# Altium PCB Board.PcbDoc
Units mm, origin at the board's own origin, x right, y up, seen from the top; angles counter-clockwise.
Board outline 73.91 x 57.78 mm, 2 copper layers (Top Layer, Bottom Layer); 84 components, 50 nets, 276 pads, 18 vias.
Unrouted connection lines stored in the file: 81.
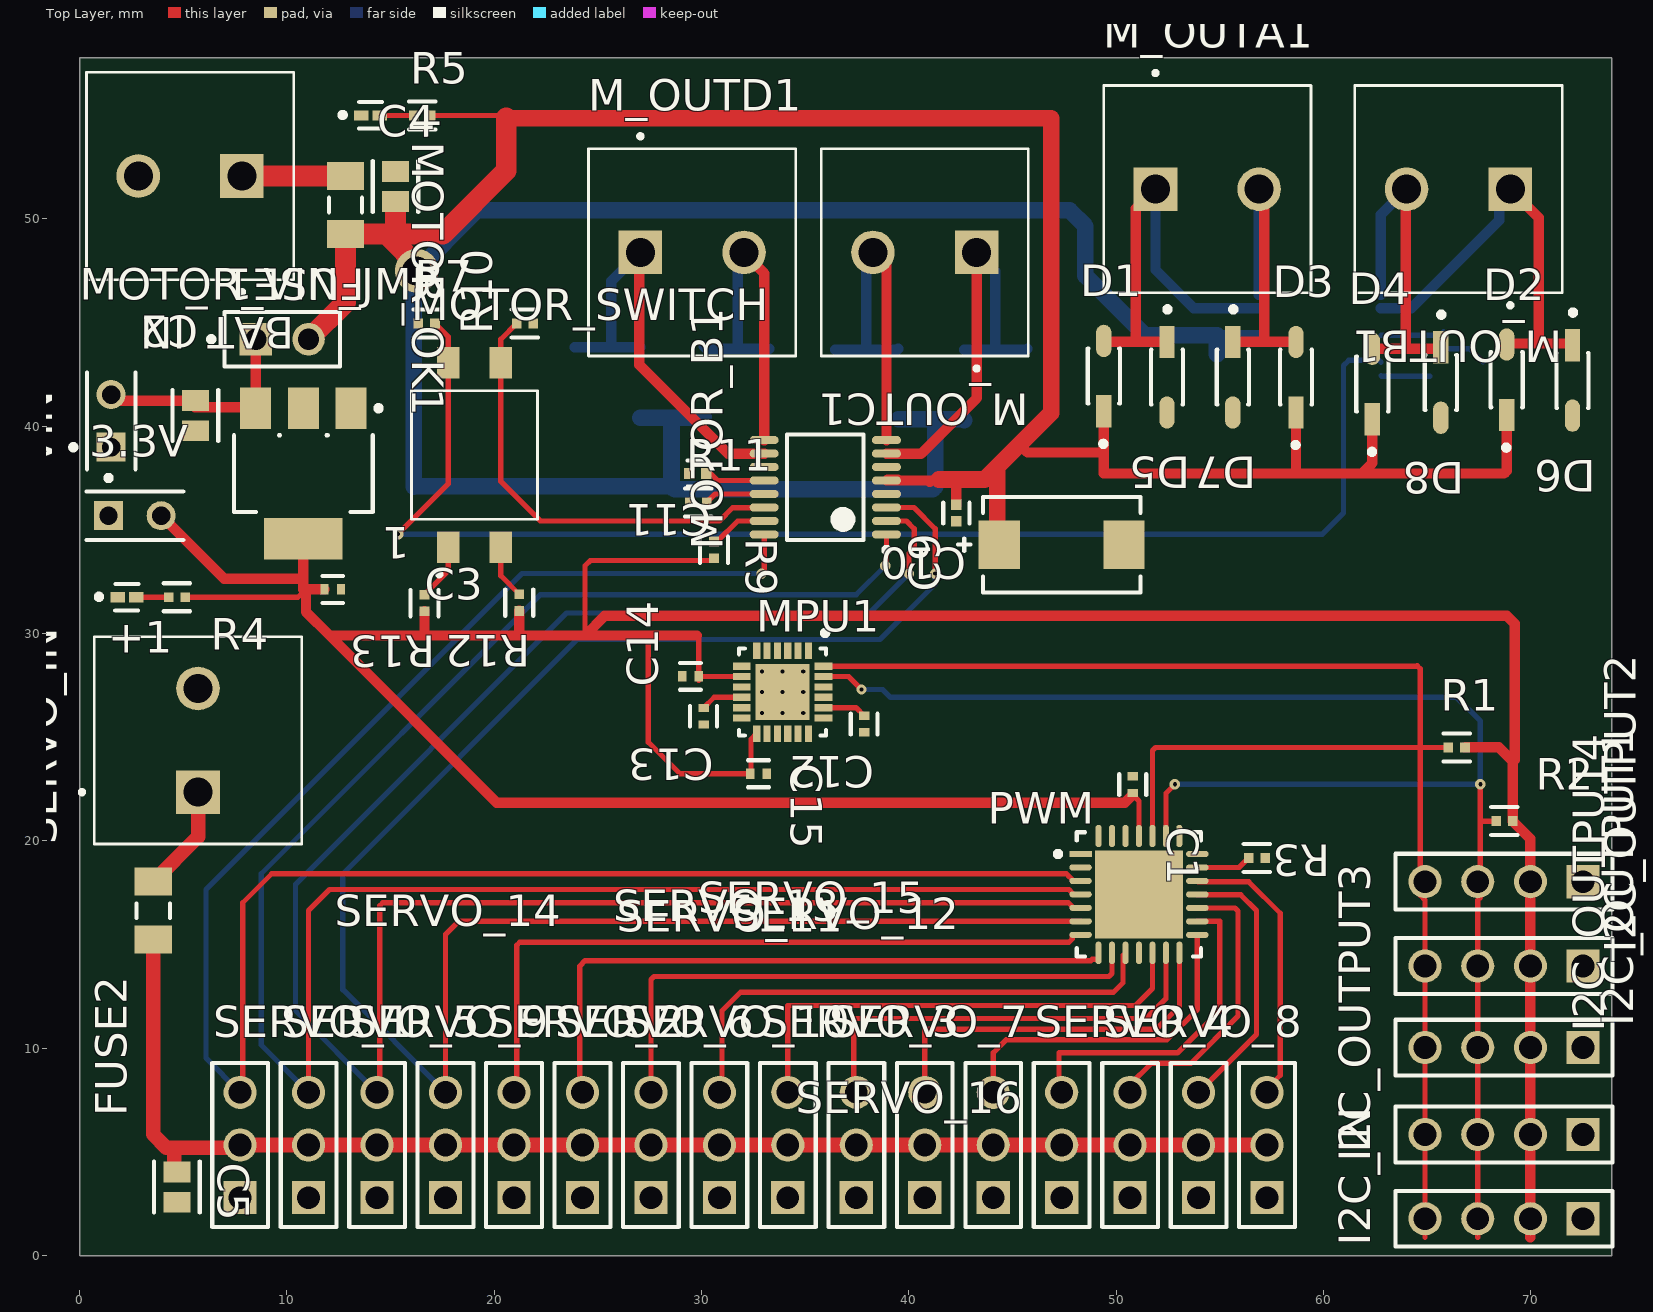
[diagram p0: Top Layer view]
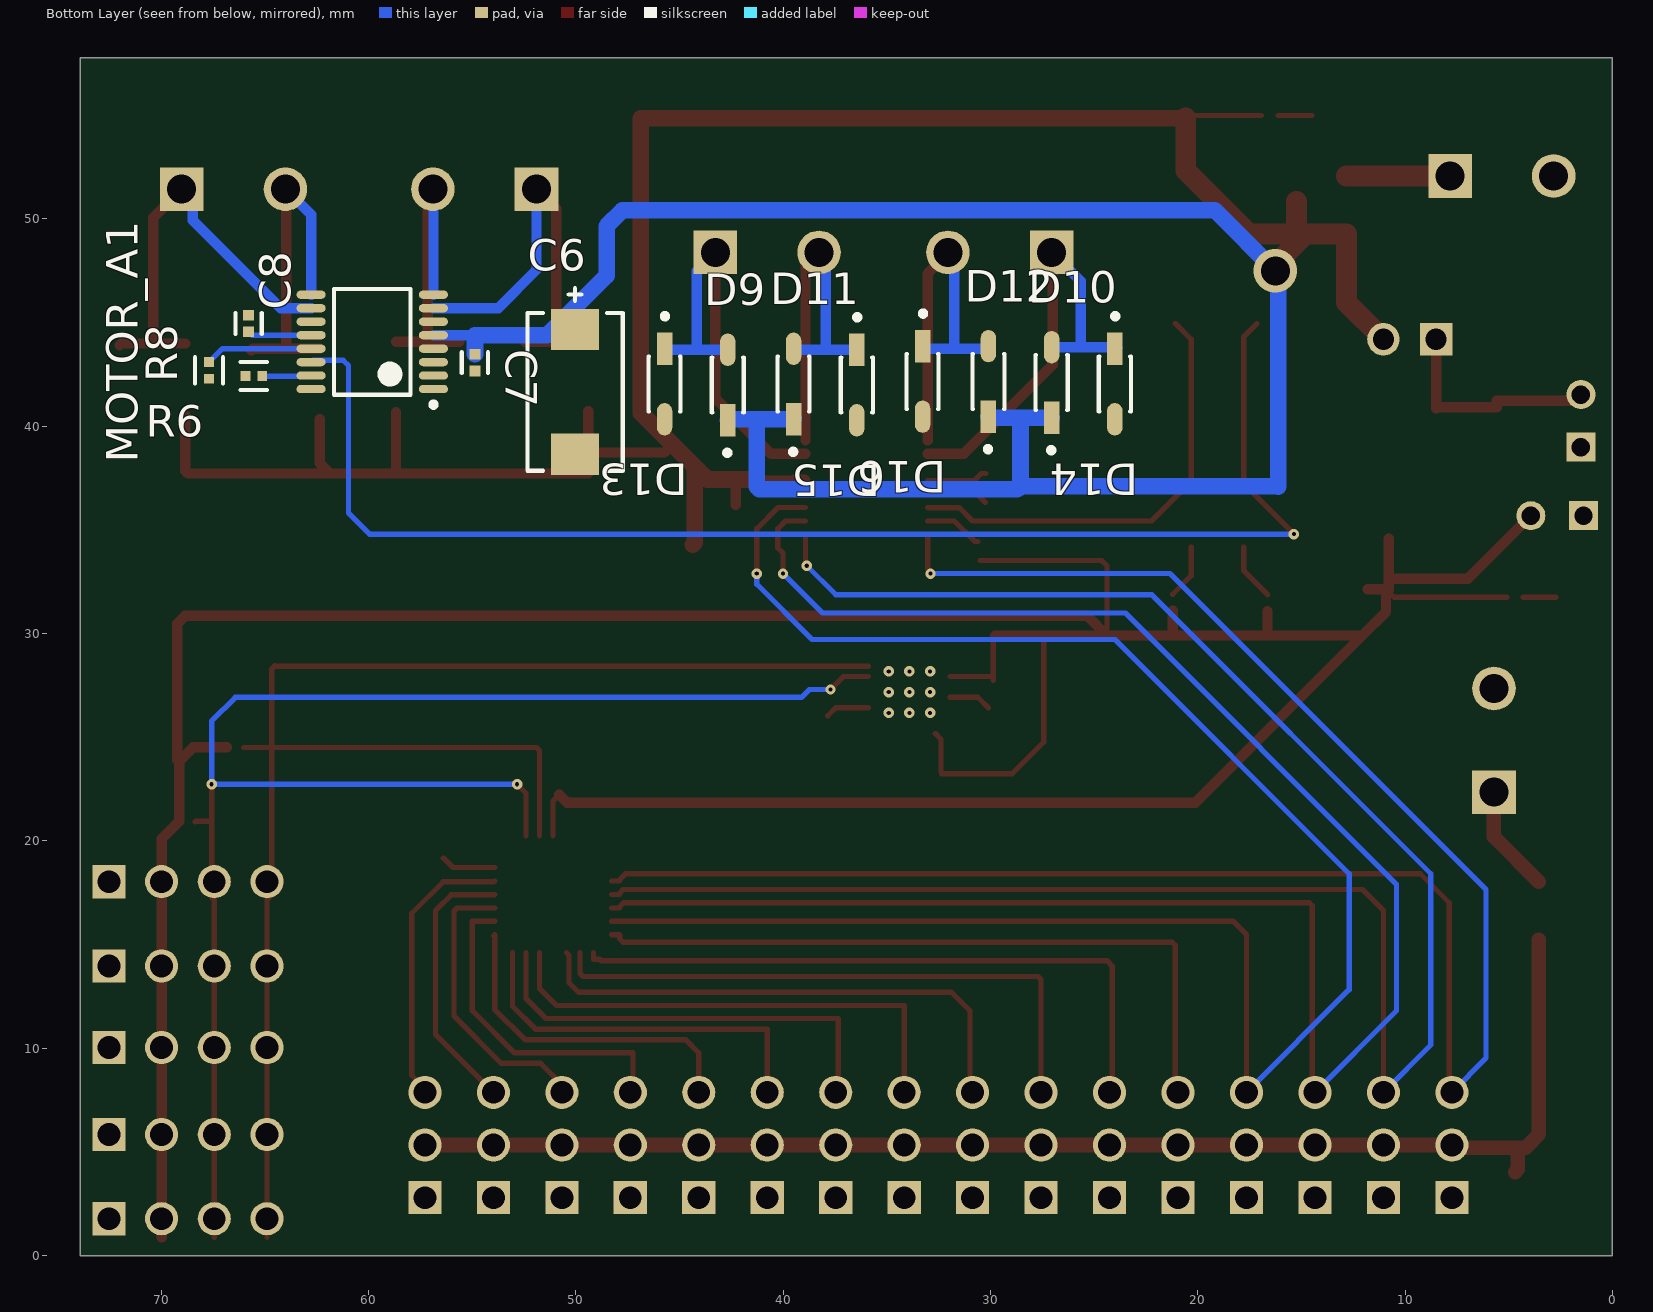
[diagram p1: Bottom Layer view, seen from below]
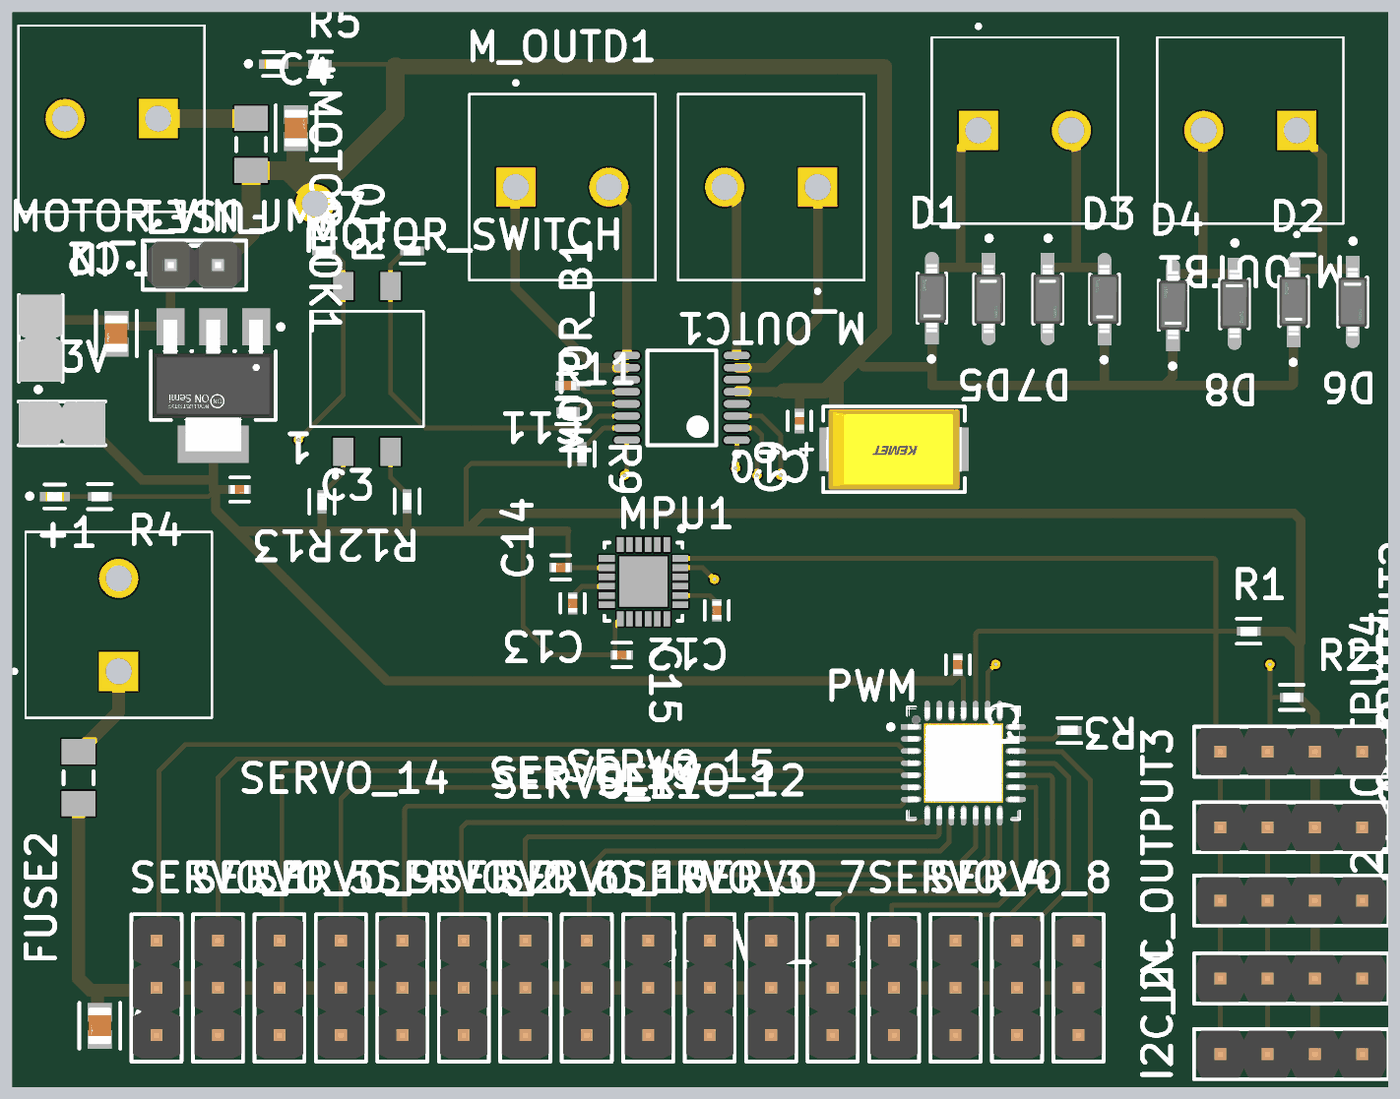
[diagram p2: 3D render of the assembled board from above, using the file's embedded part models]
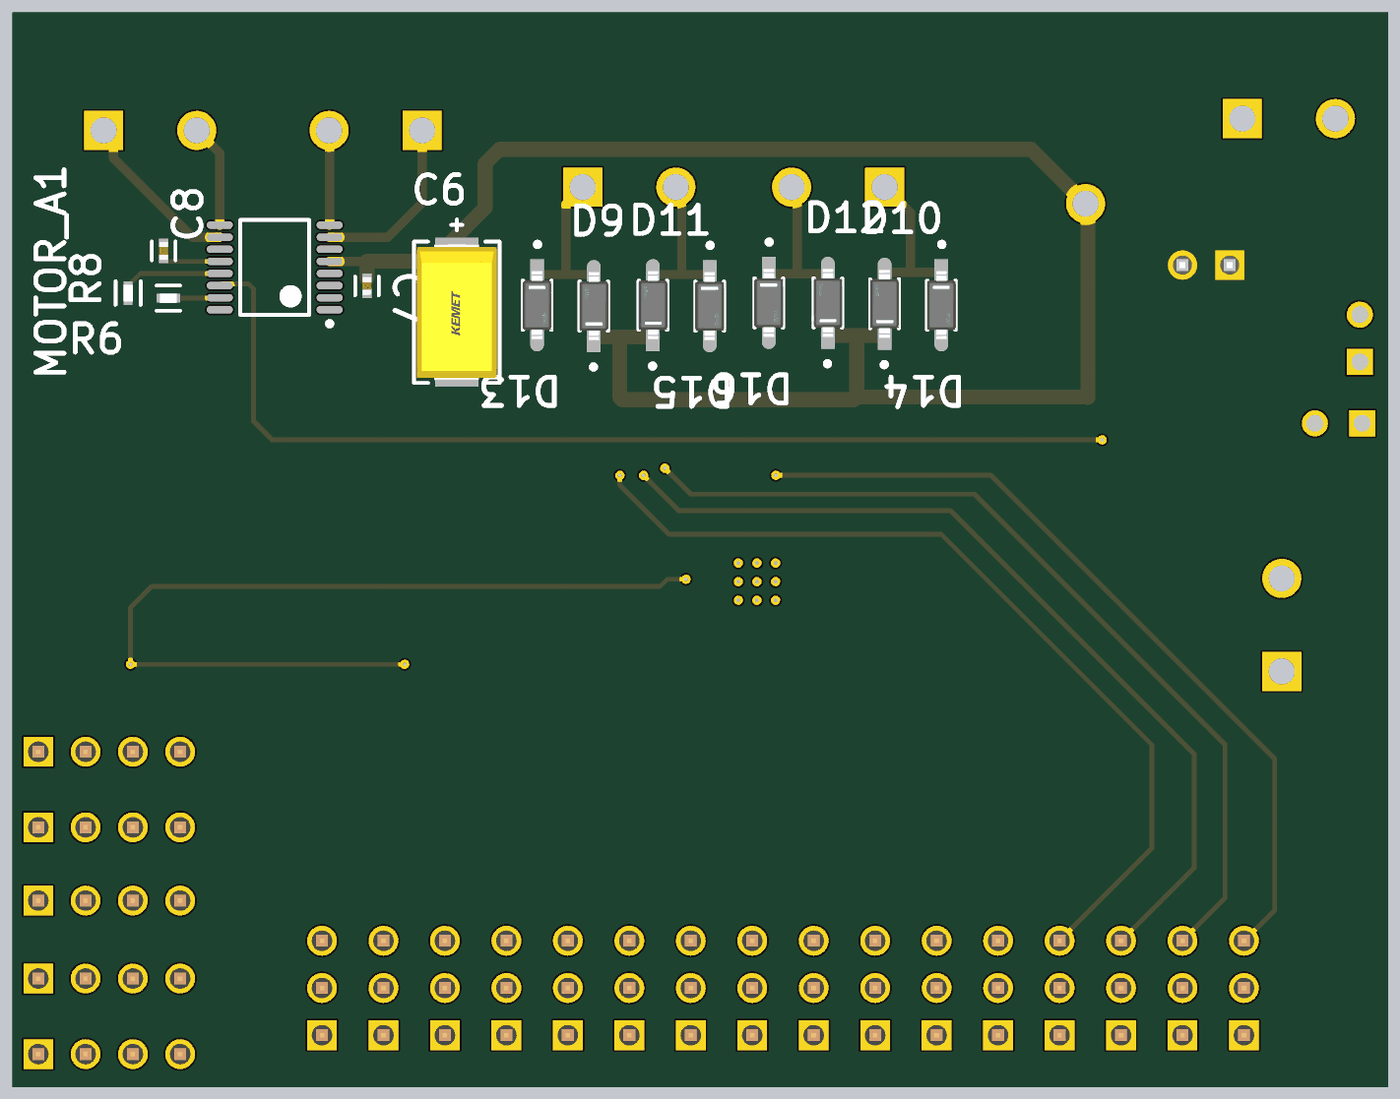
[diagram p3: 3D render of the assembled board from below, using the file's embedded part models]

## Layer stack, top to bottom
Top Solder: solder mask 0.0102, Solder Resist, Dk 3.5
Top Layer: signal copper 0.0356
Dielectric 1: dielectric 0.32, FR-4, Dk 4.8
Bottom Layer: signal copper 0.0356
Bottom Solder: solder mask 0.0102, Solder Resist, Dk 3.5

## Board outline
0,0 0,57.785 73.914,57.785 73.914,0

## Design rules (kind name [scope] priority, off if disabled: settings)
Clearance [All] p1: gap=0.15 ignorepadtopadclearanceinfootprint=TRUE
PolygonConnect [All] p1: connectstyle=Relief reliefconductorwidth=0.254 reliefentries=4 polygonreliefangle="90 Angle" airgapwidth=0.254
RoutingVias [All] p1: holewidth=0.711 width=1.27 viastyle="Through Hole" minholewidth=0.711 minwidth=1.27 maxholewidth=0.711 maxwidth=1.27
SolderMaskExpansion [All] p1: expansion=0.102 istentingtop=FALSE
UnRoutedNet [All] p1: checkbadconnections=TRUE
Width [All] p1: maxlimit=1 minlimit=0.254 preferedwidth=0.254
29 further rules are at their usual default settings.

## Classes and differential pairs
component class Sensors: C12 C13 C14 C15 MPU1
component class Power: 1 3.3V +1 +MOTOR_OK1 BAT_IN C2 C3 C4 C5 FUSE1 FUSE2 MOTOR_VIN_JMP R4 R5 SERVO_IN VIN
component class Motors: C6 C7 C8 C9 C10 C11 D1 D2 D3 D4 D5 D6 D7 D8 D9 D10 D11 D12 D13 D14 D15 D16 M_OUTA1 M_OUTB1 M_OUTC1 M_OUTD1 MOTOR_A1 MOTOR_B1 MOTOR_SWITCH R6 R7 R8 R9 R10 R11 R12 R13
component class Board: C1 I2C_IN I2C_OUTPUT1 I2C_OUTPUT2 I2C_OUTPUT3 I2C_OUTPUT4 PWM R1 R2 R3 SERVO_1 SERVO_2 SERVO_3 SERVO_4 SERVO_5 SERVO_6 SERVO_7 SERVO_8 SERVO_9 SERVO_10 SERVO_11 SERVO_12 SERVO_13 SERVO_14 SERVO_15 SERVO_16

## Components (designator, comment, footprint, x,y, rotation, side; value= is the part's Value field where it differs from the comment)
1 "NCV1117ST33T3G" FP-318H-MFG 10.795,37.719 r270 top
3.3V "5-146280-2" TECO-5-146280-2_V 2.667,35.687 r0 top
+1 "APHHS1005CGCK" FP-APHHS1005CGCK-MFG 2.286,31.75 r0 top
+MOTOR_OK1 "APHHS1005CGCK" FP-APHHS1005CGCK-MFG 14.039,54.991 r0 top
BAT_IN "282856-2" TE_282856-2 5.334,52.07 r180 top
C1 "100n 10V" FP-GRM155-0_05-MFG 50.8,22.714 r90 top
C2 "10u 25V" FP-GRM21B-0_15-IPC_C 5.588,40.513 r270 top
C3 "10u 6.3V" FP-GRM155-0_05-MFG 12.211,32.131 r0 top
C4 "10u 25V" FP-GRM21B-0_15-IPC_C 15.24,51.562 r90 top
C5 "10u 25V" FP-GRM21B-0_15-IPC_C 4.699,3.302 r270 top
C6 "47u 25V" FP-T491D476K025AT-MFG 50.038,41.656 r90 bottom
C7 "100n 25V" FP-C0402-BB-MFG 54.864,43.072 r270 bottom value="0.10 μF"
C8 "100n 16V" FP-C0402-BB-MFG 65.786,44.958 r90 bottom value="0.10 μF"
C9 "47u 25V" FP-T491D476K025AT-MFG 47.371,34.29 r180 top
C10 "100n 25V" FP-C0402-BB-MFG 42.291,35.814 r270 top value="0.10 μF"
C11 "100n 16V" FP-C0402-BB-MFG 29.826,37.719 r180 top value="0.10 μF"
C12 "2.2n 50V" FP-GRM155-0_05-MFG 37.846,25.635 r270 top
C13 "100n 2V" FP-GRM155-0_05-MFG 30.099,26.016 r270 top
C14 "10n 10V" FP-GRM155-0_05-MFG 29.464,27.94 r180 top
C15 "100n 10V" FP-GRM155-0_05-MFG 32.747,23.241 r0 top
D1 "PMEG40T30ERX" FP-SOD123-IPC_A 49.403,42.418 r90 top
D2 "PMEG40T30ERX" FP-SOD123-IPC_A 68.834,42.242 r90 top
D3 "PMEG40T30ERX" FP-SOD123-IPC_A 58.674,42.369 r90 top
D4 "PMEG40T30ERX" FP-SOD123-IPC_A 62.357,42.037 r90 top
D5 "PMEG40T30ERX" FP-SOD123-IPC_A 52.451,42.369 r270 top
D6 "PMEG40T30ERX" FP-SOD123-IPC_A 72.009,42.213 r270 top
D7 "PMEG40T30ERX" FP-SOD123-IPC_A 55.626,42.369 r270 top
D8 "PMEG40T30ERX" FP-SOD123-IPC_A 65.659,42.115 r270 top
D9 "PMEG40T30ERX" FP-SOD123-IPC_A 42.672,41.988 r90 bottom
D10 "PMEG40T30ERX" FP-SOD123-IPC_A 27.051,42.115 r90 bottom
D11 "PMEG40T30ERX" FP-SOD123-IPC_A 39.497,42.037 r90 bottom
D12 "PMEG40T30ERX" FP-SOD123-IPC_A 30.099,42.164 r90 bottom
D13 "PMEG40T30ERX" FP-SOD123-IPC_A 45.72,42.037 r270 bottom
D14 "PMEG40T30ERX" FP-SOD123-IPC_A 24.003,42.037 r270 bottom
D15 "PMEG40T30ERX" FP-SOD123-IPC_A 36.449,41.988 r270 bottom
D16 "PMEG40T30ERX" FP-SOD123-IPC_A 33.274,42.164 r270 bottom
FUSE1 "SF-1206HH15SF-1206HH10M-2M-2" RESC3216X12N 12.827,50.673 r270 top
FUSE2 "SF-1206HH15SF-1206HH10M-2M-2" RESC3216X12N 3.556,16.637 r270 top
I2C_IN "61300411121" 61300411121 68.707,1.778 r180 top
I2C_OUTPUT1 "61300411121" 61300411121 68.707,13.97 r180 top
I2C_OUTPUT2 "61300411121" 61300411121 68.707,18.034 r180 top
I2C_OUTPUT3 "61300411121" 61300411121 68.707,5.842 r180 top
I2C_OUTPUT4 "61300411121" 61300411121 68.707,10.033 r180 top
M_OUTA1 "282856-2" TE_282856-2 54.396,51.435 r0 top
M_OUTB1 "282856-2" TE_282856-2 66.508,51.435 r180 top
M_OUTC1 "282856-2" TE_282856-2 40.767,48.387 r180 top
M_OUTD1 "282856-2" TE_282856-2 29.551,48.387 r0 top
MOTOR_A1 "TC78H660FNG" TSOP65P640X120-16N 59.817,44.069 r0 bottom
MOTOR_B1 "TC78H660FNG" TSOP65P640X120-16N 35.97,37.058 r180 top
MOTOR_SWITCH "DS04-254-2-02BK-SMT" SW_DS04-254-2-02BK-SMT 19.05,38.613 r90 top
MOTOR_VIN_JMP "M20-9990246" FP-M20-9990246-MFG 9.779,44.196 r0 top
MPU1 "MPU6050" INSE-QFN-24_V 33.909,27.178 r270 top
PWM "PCA9685BS,118" FP-SOT788-1-IPC_B 51.099,17.421 r0 top
R1 "1k" FP-CRCW0402-e3-IPC_C 66.421,24.511 r0 top
R2 "1k" FP-CRCW0402-e3-IPC_C 68.728,20.955 r0 top
R3 "10k" FP-CRCW0402-e3-IPC_C 56.79,19.177 r180 top
R4 "470" FP-CRCW0402-e3-IPC_C 4.699,31.75 r0 top
R5 "470" FP-CRCW0402-e3-IPC_C 16.531,54.991 r0 top
R6 "10k" FP-CRCW0402-e3-IPC_C 65.532,42.418 r0 bottom
R7 "1Meg" FP-CRCW0402-e3-IPC_C 16.743,44.958 r0 top
R8 "47k" FP-CRCW0402-e3-IPC_C 67.691,42.693 r90 bottom
R9 "10k" FP-CRCW0402-e3-IPC_C 30.607,34.036 r270 top
R10 "1Meg" FP-CRCW0402-e3-IPC_C 21.484,44.958 r180 top
R11 "47k" FP-CRCW0402-e3-IPC_C 29.845,36.322 r0 top
R12 "10k" FP-CRCW0402-e3-IPC_C 21.209,31.496 r270 top
R13 "10k" FP-CRCW0402-e3-IPC_C 16.637,31.475 r270 top
SERVO_1 "61300311121" 61300311121 7.747,5.334 r90 top
SERVO_2 "61300311121" 61300311121 20.955,5.334 r90 top
SERVO_3 "61300311121" 61300311121 34.163,5.334 r90 top
SERVO_4 "61300311121" 61300311121 47.371,5.334 r90 top
SERVO_5 "61300311121" 61300311121 11.049,5.334 r90 top
SERVO_6 "61300311121" 61300311121 24.257,5.334 r90 top
SERVO_7 "61300311121" 61300311121 37.465,5.334 r90 top
SERVO_8 "61300311121" 61300311121 50.673,5.334 r90 top
SERVO_9 "61300311121" 61300311121 14.351,5.334 r90 top
SERVO_10 "61300311121" 61300311121 27.559,5.334 r90 top
SERVO_11 "61300311121" 61300311121 40.767,5.334 r90 top
SERVO_12 "61300311121" 61300311121 53.975,5.334 r90 top
SERVO_13 "61300311121" 61300311121 17.653,5.334 r90 top
SERVO_14 "61300311121" 61300311121 30.861,5.334 r90 top
SERVO_15 "61300311121" 61300311121 44.069,5.334 r90 top
SERVO_16 "61300311121" 61300311121 57.277,5.334 r90 top
SERVO_IN "282856-2" TE_282856-2 5.715,24.852 r90 top
VIN "5-146280-2" TECO-5-146280-2_V 1.524,40.259 r90 top

## Footprints (in the part's own frame and the unit in brackets; to place one, negate y for a bottom-side part, rotate by r counter-clockwise, add the part's x,y. Pads: shape width x height; smd on the part's side, far side on the other; paste and mask are expansions set on the pad)
61300311121 [mm] "Pin Header, pitch 2.54 mm, THT, Vertical, single row, 3p"
  rect 1.6x1.6 hole 1.1: 1(-2.54,0)
  round 1.6 hole 1.1: 2(0,0) 3(2.54,0)
  silkscreen extent -3.96,-1.35 3.96,1.35, body extent -3.81,-1.27 3.81,1.27, height 8.57
61300411121 [mm] "Pin Header, pitch 2.54 mm, THT, Vertical, single row, 4p"
  rect 1.6x1.6 hole 1.1: 1(-3.81,0)
  round 1.6 hole 1.1: 2(-1.27,0) 3(1.27,0) 4(3.81,0)
  silkscreen extent -5.23,-1.35 5.23,1.35, body extent -5.08,-1.27 5.08,1.27, height 8.57
FP-318H-MFG [mm]
  rect 2x1.5 smd paste+0 mask+0: 1(-3.15,2.3) 2(-3.15,0) 3(-3.15,-2.3)
  rect 2x3.8 smd paste+0 mask+0: 4(3.15,0)
  silkscreen extent -3.27,-3.35 1.85,3.75, body extent -4.25,-3.45 4.25,3.45, height 0.25
FP-APHHS1005CGCK-MFG [mm]
  rect 0.7x0.5 smd paste+0 mask+0: 1(-0.45,0) 2(0.45,0)
  silkscreen extent -1.47,-0.63 0.55,0.65, body extent -0.9,-0.4 0.9,0.4, height 0.25
FP-C0402-BB-MFG [mm]
  rect 0.52x0.52 smd paste+0 mask+0: 1(-0.4,0) 2(0.4,0)
  silkscreen extent -0.5,-0.64 0.5,0.64, body extent -0.5,-0.25 0.5,0.25, height 0.55
FP-CRCW0402-e3-IPC_C [mm]
  rect 0.468x0.472 smd paste+0 mask+0: 1(-0.402,0) 2(0.402,0)
  silkscreen extent -0.64,-0.67 0.64,0.67, body extent -0.74,-0.38 0.74,0.38, height 0.25
FP-GRM21B-0_15-IPC_C [mm]
  rect 1.006x1.308 smd paste+0 mask+0: 1(-0.726,0) 2(0.726,0)
  silkscreen extent -1.23,-1.1 1.23,1.1, body extent -1.33,-0.8 1.33,0.8, height 0.25
FP-GRM155-0_05-MFG [mm]
  rect 0.4x0.5 smd paste+0 mask+0: 1(-0.4,0) 2(0.4,0)
  silkscreen extent -0.5,-0.65 0.5,0.65, body extent -0.7,-0.38 0.7,0.38, height 0.25
FP-M20-9990246-MFG [mm]
  rect 1.57x1.57 hole 1.02 paste-1000 mask+0: 1(-1.27,0)
  round 1.57 hole 1.02 paste-1000 mask+0: 2(1.27,0)
  silkscreen extent -3.55,-1.32 2.79,1.32, body extent -2.89,-1.42 2.89,1.42, height 0.25
FP-SOD123-IPC_A [mm]
  rect 1.557x0.742 smd paste+0 mask+0: 1(-1.7,0)
  rrect100% 1.557x0.742 smd paste+0 mask+0: 2(1.7,0)
  silkscreen extent -3.39,-0.77 1.33,0.77, body extent -2.98,-1.28 2.98,1.28, height 0.25
FP-SOT788-1-IPC_B [mm]
  rect 1.081x0.292 smd paste+0 mask+0: 1(-2.816,1.95)
  rrect100% 1.081x0.292 smd paste+0 mask+0: 2(-2.816,1.3) 3(-2.816,0.65) 4(-2.816,0) 5(-2.816,-0.65) 6(-2.816,-1.3) 7(-2.816,-1.95) 15(2.816,-1.95) 16(2.816,-1.3) 17(2.816,-0.65) 18(2.816,0) 19(2.816,0.65) 20(2.816,1.3) 21(2.816,1.95)
  rrect100% 0.292x1.081 smd paste+0 mask+0: 8(-1.95,-2.816) 9(-1.3,-2.816) 10(-0.65,-2.816) 11(0,-2.816) 12(0.65,-2.816) 13(1.3,-2.816) 14(1.95,-2.816) 22(1.95,2.816) 23(1.3,2.816) 24(0.65,2.816) 25(0,2.816) 26(-0.65,2.816) 27(-1.3,2.816) 28(-1.95,2.816)
  rect 4.25x4.25 smd paste-1000 mask+0: 29(0,0)
  silkscreen extent -4.03,-3 3,3, body extent -3.61,-3.61 3.61,3.61, height 0.25
FP-T491D476K025AT-MFG [mm]
  rect 1.99x2.33 smd paste+0 mask+0: 1(-3.01,0) 2(3.01,0)
  silkscreen extent -3.8,-2.3 5,2.3, body extent -3.65,-2.15 3.65,2.15, height 3.1
INSE-QFN-24_V [mm] "QFN, 24-Leads, Body 4.00x4.00mm, Pitch 0.50mm, Thermal Pad 2.7x2.6mm"
  rect 0.8x0.35 smd: 1(-2,1.25) 2(-2,0.75) 3(-2,0.25) 4(-2,-0.25) 5(-2,-0.75) 6(-2,-1.25) 13(2,-1.25) 14(2,-0.75) 15(2,-0.25) 16(2,0.25) 17(2,0.75) 18(2,1.25)
  rect 0.35x0.85 smd: 7(-1.25,-1.975) 8(-0.75,-1.975) 9(-0.25,-1.975) 10(0.25,-1.975) 11(0.75,-1.975) 12(1.25,-1.975) 19(1.25,1.975) 20(0.75,1.975) 21(0.25,1.975) 22(-0.25,1.975) 23(-0.75,1.975) 24(-1.25,1.975)
  rect 2.7x2.6 smd: 25(0,0)
  silkscreen extent -2.97,-2.1 2.1,2.18, body extent -2,-2 2,2, height 0.95
RESC3216X12N [mm] "Chip Resistor, 2-Leads, Body 3,20x1,60mm, IPC Medium Density"
  rect 1.35x1.8 smd: 1(-1.4,0) 2(1.4,0)
  silkscreen extent -0.35,-0.8 0.35,0.8, body extent -1.7,-0.9 1.7,0.9, height 1.2
SW_DS04-254-2-02BK-SMT [mm]
  rect 1.5x1.1 smd: 1A(-4.45,1.27) 1B(4.45,1.27) 2A(-4.45,-1.27) 2B(4.45,-1.27)
  silkscreen extent -5.85,-3.04 3.1,3.04
TE_282856-2 [mm]
  rect 2.1x2.1 hole 1.4: 1(-2.5,0)
  round 2.1 hole 1.4: 2(2.5,0)
  silkscreen extent -5,-5 5,5.7
TECO-5-146280-2_V [mm] "Connector, 2-Leads, Body 4.67x2.34mm, Pitch 2.54mm"
  rect 1.4x1.4 hole 0.89: 1(-1.27,0)
  round 1.4 hole 0.89: 2(1.27,0)
  silkscreen extent -2.33,-1.17 2.33,1.94, body extent -2.34,-1.17 2.34,1.17, height 5.33
TSOP65P640X120-16N [mm] "TSOP, 16-Leads, Body 5,00x4,40mm, Pitch 0,65mm, IPC Medium Density"
  oval 1.4x0.4 smd: 1(-2.95,2.275) 2(-2.95,1.625) 3(-2.95,0.975) 4(-2.95,0.325) 5(-2.95,-0.325) 6(-2.95,-0.975) 7(-2.95,-1.625) 8(-2.95,-2.275) 9(2.95,-2.275) 10(2.95,-1.625) 11(2.95,-0.975) 12(2.95,-0.325) 13(2.95,0.325) 14(2.95,0.975) 15(2.95,1.625) 16(2.95,2.275)
  silkscreen extent -3.07,-2.55 1.85,3.15, body extent -1.91,-2.55 1.91,2.55, height 1.2

## Part data
1: library part CMP-07128-000021-1, "IC REG LINEAR 3.3V 1A SOT223", Ambient Temperature Range High=+125°C, Ambient Temperature Range Low=-40°C, Dropout Voltage=1.07V, Manufacturer="ON Semiconductor", Max Junction Temp=+150°C, Max Supply Voltage=20V, Min Supply Voltage=2.4V, Nominal Supply Current=6mA, Output Current=1A, Output Voltage=3.3V, Package=318H, Temperature="-55°C to +150°C", Temperature Range Low=-55°C, Accuracy Percentage=1%, Automotive=Yes, Automotive Grade="Grade 0", Category=IC, ComponentLink2Description=Datasheet, ComponentLink2URL=https://www.onsemi.com/pub/Collateral/NCP1117-D.PDF, Device Class L1="Integrated Circuits (ICs)", Device Class L2="Power Management ICs", Device Class L3="Voltage Regulators - Linear", Digikey Description="IC REG LINEAR 3.3V 1A SOT223", Height=1.8mm, Ipc Land Pattern Name=SOT230P700X180-4, Lead Free=Yes, Manufacturer Part Number=NCV1117ST33T3G, Mouser Description="LDO Voltage Regulators 3.3V 1.0A Automotive", Number Of Outputs=1, Octopart=https://octopart.com/ncv1117st33t3g-on+semiconductor-1215835, Output Type=Fixed, RoHS=TRUE, Standoff Height=0.02mm, Temperature Range High=+150°C
3.3V VIN: library part CMP-2000-07492-1, "Male Header, Pitch 2.54 mm, 1 x 2 Position, Height 8.21 mm, Tail Length 3.05 mm, -65 to 105 degC, RoHS, Bulk", Case\/Package=100, Colour=Black, Current Rating=3A, Flammability Rating=UL94V-0, High Temperature Housing=Yes, Manufacturer="TE Connectivity", Max Current Rating=5A, Max Operating Temperature=105degC, Min Operating Temperature=-65degC, Package Description="Male Header, Pitch 2.54 mm, 1 x 2 Position, Height 8.21 mm, Tail Length 3.05 mm", Package Quantity=500, Approvals=CSA, Board Standoff=No(Without), Connector Type=Header, Contact Gender=Male, Contact Material=CopperAlloy, Contact Mating Length=0.23inch, Contact Plating=Matte, Contact Protection=No(Without), Contact Shape=Square, Datasheet URL=http://www.te.com/commerce/DocumentDelivery/DDEController?Action=showdoc&DocId=Customer+Drawing%7F146280%7FH1%7Fpdf%7FEnglish%7FENG_CD_146280_H1.pdf%7F5-146280-2, Datasheet Version="Rev. H1, 08/2016", Depth=2.34mm, Gasket=No(Without), High Speed Serial Data Connector=No, Housing Colour=Black, Housing Material=Polymer, Keyed=No, Length=4.67mm, Manufacturer URL=http://www.te.com/, Mating Alignment=No(Without), Mating Connector Lock=No(Without), Mating Post Length=0.23inch, Mount=ThroughHole, Mounting Technology=ThroughHole, Number of Contacts=2, Number of Positions=2, Number of Rows=1, Orientation=Straight, Package Reference=5-146280-2, Packaging=Carton, Panel Mount Retention=No(Without), PCB Mount Retention=Without, PCB Mounting Orientation=Vertical, PCB Thickness=0.063inch, Pitch=2.54mm, Radiation Hardening=No, RoHSCompliant=true, Row Spacing=2.54mm, Selectively Loaded=No(Without), Stabilizers=No(Without), Termination=ThroughHole, Termination Post Length=0.12inch
+1 +MOTOR_OK1: library part CMP-44529-000044-1, "LED GREEN CLEAR CHIP SMD", Case Code (Imperial)=0402, Case Code (Metric)=1005, Color=Green, Forward Current=20mA, Forward Voltage=2.1V, Lens Color=Clear, Max Operating Temperature=85°C, Min Operating Temperature=-40°C, Package Quantity=2000, Case/Package=0402, Dominant Wavelength=570nm, Height=0.6mm, Illumination Color=Green, Lead Free="Lead Free", Length=1mm, Lens Style=Clear, Luminous Intensity=50mcd, Mount="Surface Mount", Number of LEDs=1, Number of Pins=2, Packaging="Tape and Reel", Test Current=20mA, Viewing Angle=120°, Wavelength=570nm, Width=0.5mm
BAT_IN M_OUTA1 M_OUTB1 M_OUTC1 M_OUTD1 SERVO_IN: library part CMP-036-000000-1, "TERMI-BLOK PCB MOUNT 2P", Package=None, Component Type=Standard, Design Item ID=282856-2, Digi-Key_Part_Number=A98108-ND, Digi-Key_Purchase_URL=https://www.digikey.com/product-detail/en/te-connectivity-amp-connectors/1-282856-2/A98108-ND/1826971?utm_source=snapeda&utm_medium=aggregator&utm_campaign=symbol, EU_RoHS_Compliance="Compliant with Exemptions", MF="TE Connectivity", MP=282856-2, Pin Count=2, SnapEDA_Link=https://www.snapeda.com/parts/282856-2/TE%20Connectivity%20AMP%20Connectors/view-part/1809079/?ref=snap, Source=SnapEDAsch.SchLib, TE_purchase_URL=https://www.te.com/usa-en/product-282856-2.html?te_bu=Cor&te_type=disp&te_campaign=seda_glo_cor-seda-global-disp-prtnr-fy19-seda-model-bom-cta_sma-317_1&elqCampaignId=32493
C1 C3 C12 C13 C14 C15: library part CMP-2008-04345-2, "Chip Multilayer Ceramic Capacitors for General Purpose, 0402, 390pF, C0G, 30ppm/°C, 5%, 50V", Capacitance=390pF, Case Code (Imperial)=0402, Case Code (Metric)=1005, Dielectric=C0G, Max Operating Temperature=125°C, Min Operating Temperature=-55°C, Package Quantity=1, Temperature Coefficient=30ppm/°C, Tolerance=5%, Voltage=50V, Case/Package=0402, Depth=0.5mm, Height=0.5mm, Lead Free="Lead Free", Length=1mm, Material=Ceramic, Mount="Surface Mount", Packaging="Tape and Reel", Radiation Hardening=No, REACH SVHC="No SVHC", Termination=SMD/SMT, Thickness=0.022inch, Voltage Rating=50V, Voltage Rating (DC)=50V, Width=0.02inch
C2 C4 C5: library part CMP-2007-03541-2, "Chip Multilayer Ceramic Capacitors for General Purpose, 0805, 10uF, X5R, 15%, 10%, 25V", Capacitance=10uF, Case Code (Imperial)=0805, Case Code (Metric)=2012, Dielectric=X5R, Max Operating Temperature=85°C, Min Operating Temperature=-55°C, Package Quantity=1, Tolerance=10%, Voltage=25V, Case/Package=0805, Depth=1.25mm, Height=1.25mm, Lead Free="Lead Free", Length=2mm, Material=Ceramic, Mount="Surface Mount", Packaging="Tape and Reel", Radiation Hardening=No, Termination=SMD/SMT, Thickness=0.053inch, Voltage Rating=25V, Voltage Rating (DC)=25V, Width=0.049inch
C6 C9: library part CMP-03017-000020-1, "CAP TANT 47UF 10% 25V 2917", Capacitance=47uF, Case Code (Imperial)=2917, Case Code (Metric)=7343, Dielectric Material=Tantalum, ESR (Equivalent Series Resistance)=700mR, Leakage Current=11.8uA, Max Operating Temperature=125°C, Min Operating Temperature=-55°C, Package Quantity=1, Ripple Current=463mA, Tolerance=10%, Voltage=25V, Case/Package=2917, Depth=4.3mm, Dissipation Factor=10%, Failure Rate=0.001%, Features="General Purpose", Height=2.8mm, Height - Seated (Max)=0.122inch, Lead Free="Lead Free", Length=7.3mm, Life (Hours)=2000Hour, Mount="Surface Mount", Number of Pins=2, Packaging="Tape and Reel", Polarity=Polar, Radiation Hardening=No, REACH SVHC="No SVHC", RoHS Compliant=Yes, Termination=SMD/SMT, Voltage Rating=25V, Voltage Rating (DC)=25V, Weight=0.023634oz, Width=4.3mm
C7 C8 C10 C11: library part CMP-2008-02108-2, "CAP CER 0.1UF 16V X7R 0402", Capacitance="0.10 μF", Manufacturer=Kemet, Manufacturer Part Number=C0402C104K4RACTU, Package=C0402-BB, Temperature="-55°C to +125°C", Temperature Characteristic=X7R, Temperature Coefficient=15%, Temperature Range High=+125°C, Temperature Range Low=-55°C, Tolerance=0.1, Voltage Rating="16 V", Automotive=No, Category=Cap, ComponentLink2Description=Datasheet, ComponentLink2URL=https://content.kemet.com/datasheets/KEM_C1002_X7R_SMD.pdf, Device Class L1="Passive Components", Device Class L2=Capacitors, Device Class L3="Ceramic Capacitors", Digikey Description="CAP CER 0.1UF 16V X7R 0402", Height=0.55mm, Ipc Land Pattern Name=CAPC10050X50, Lead Free=Yes, Material=Ceramic, Mouser Description="Cap Ceramic 0.1uF 16V X7R 10% SMD 0402 125?C Paper T/R - Tape and Reel (Alt: C0402C104K4RAC TU)", Octopart=https://octopart.com/c0402c104k4ractu-kemet-94158, RoHS=TRUE
D1 D2 D3 D4 D5 D6 D7 D8 D9 D10 D11 D12 D13 D14 D15 D16: library part CMP-0303-00003-3, "DIODE SCHOTTKY 40V 1A SOD123", Average Rectified Current=1A, Capacitance=110pF, Case/Package=SOD-123-2, Forward Voltage=450mV, Max Forward Surge Current (Ifsm)=25A, Max Operating Temperature=125°C, Max Power Dissipation=450mW, Max Repetitive Reverse Voltage (Vrrm)=40V, Min Operating Temperature=-65°C, Package Quantity=3000, Peak Reverse Current=50uA, Contact Plating=Tin, Current Rating=1A, Element Configuration=Single, Forward Current=1A, Height=1.25mm, Lead Free="Lead Free", Length=2.85mm, Max Reverse Voltage (DC)=40V, Number of Pins=2, Output Current=1A, Packaging="Tape and Reel", Peak Non-Repetitive Surge Current=25A, Polarity=Standard, Radiation Hardening=No, REACH SVHC="No SVHC", Termination=SMD/SMT, Voltage Rating (DC)=40V, Weight=0.000353oz, Width=1.7mm
FUSE1 FUSE2: library part CMP-005-00013-1, "Fuse Chip 10A 24VDC High Current and High Inrush Current Withstand 2-Pin SMD T/R"
I2C_IN I2C_OUTPUT1 I2C_OUTPUT2 I2C_OUTPUT3 I2C_OUTPUT4: library part CMP-1502-01064-1, "THT Vertical Pin Header WR-PHD, Pitch 2.54 mm, Single Row, 4 pins", Contact Resistance=20mOhm, Manufacturer="Wurth Elektronik", Operating Temperature=-40to105degC, Rated Current=3A, Withstanding Voltage=500VAC, Working Voltage=250VAC, Datasheet URL=https://katalog.we-online.de/em/datasheet/6130xx11121.pdf, Gender=Male, Manufacturer URL=http://www.we-online.de, Mounting Technology=THT, Orientation=Vertical, Package Reference=61300411121, Packaging=Bag, Part Number=61300411121, Pin Number=4, Pitch=2.54mm, Publisher=WurthElektronik, Row Number=Single
MOTOR_A1 MOTOR_B1: library part CMP-024-00000-1, "Toshiba two channel dc motor driver , 2A for each channel."
MOTOR_SWITCH: library part CMP-038-000000-1, "2 Position, Surface Mount, 2.54 mm Pitch, Flat Slide Actuator, Flat Bottom, SMT Pin, DIP Switch", Package=None, Check_prices=https://www.snapeda.com/parts/DS04-254-2-02BK-SMT/CUI+Devices/view-part/?ref=eda, Component Type=Standard, CUI_purchase_URL=https://www.cuidevices.com/product/switches/dip-switches/ds04-254-smt-series?utm_source=snapeda.com&utm_medium=referral&utm_campaign=snapedaBOM, Design Item ID=DS04-254-2-02BK-SMT, Digi-Key_Part_Number=2223-DS04-254-2-02BK-SMT-ND, MF="CUI Devices", MP=DS04-254-2-02BK-SMT, Pin Count=4, Purchase-URL=https://pricing.snapeda.com/search/part/DS04-254-2-02BK-SMT/?ref=eda, SnapEDA_Link=https://www.snapeda.com/parts/DS04-254-2-02BK-SMT/CUI+Devices/view-part/?ref=snap, Source=DS04-254-2-02BK-SMT.SchLib
MOTOR_VIN_JMP: library part CMP-15831-000009-1, "CONN HEADER VERT 2POS 2.54MM", Current Rating=3A, Manufacturer=Harwin, Temperature="-40°C to +105°C", Temperature Range High=+105°C, Temperature Range Low=-40°C, Automotive=No, Category=Conn, ComponentLink2Description=Datasheet, ComponentLink2URL=https://cdn.harwin.com/pdfs/M20-999.pdf, Conn Gender=Male, Conn Orientation=Vertical, Contact Material=Tin,Nickel, Device Class L1=Connectors, Device Class L2="Headers and Wire Housings", Device Class L3=unset, Digikey Description="CONN HEADER VERT 2POS 2.54MM", Height=8.99mm, Lead Free=Yes, Manufacturer Part Number=M20-9990246, Mouser Description="2.54mm (0.1\") Pitch SIL Vertical PC Tail Pin Header, 6.1mm mating pin height, tin, 2 contacts", Number of Contacts=2, Number of Rows=1, Octopart=https://octopart.com/m20-9990246-harwin-2590635, Package=M20-9990246, Pitch=2.54mm, RoHS=TRUE
MPU1: library part CMP-010-00014-3, "3-Axis Gyroscope, 3-Axis Accelerometer, 2.375 to 3.46 V, -40 to 105 degC, 24-Pin QFN, RoHS, Tape and Reel", Case/Package=QFN, Manufacturer=InvenSense, Max Operating Temperature=85°C, Max Supply Voltage=3.6V, Min Operating Temperature=-40°C, Min Supply Voltage=2.5V, Package Description="24-Pin Quad Flat No-lead Package, Body 4 x 4 mm, Pitch 0.5 mm", Package Quantity=5000, Package Reference=QFN-24, Datasheet URL=https://datasheet.ciiva.com/1513/1788002-1513632.pdf, Datasheet Version="Rev. 3.4, 08/2013", Interface=I2C, Mounting Technology=SM, Packaging=CutTape, Pins=24, RoHS Compliant=True, Sensor Type=Motion
PWM: library part CMP-1595-00001-4, "IC LED DRVR LIN DIM 25MA 28HVQFN", Case/Package=VQFN, Frequency=50MHz, Max Operating Temperature=85°C, Min Operating Temperature=-40°C, Output Voltage=5.5V, Package Quantity=4000, Contact Plating=Gold, Mount="Surface Mount", Number Of Outputs=16, Number of Pins=28, Packaging="Tape and Reel", Radiation Hardening=No, RoHS Compliant=Yes
R1 R2 R3 R4 R5 R6 R7 R8 R9 R10 R11 R12 R13: library part CMP-2002-08122-2, "RES Thick Film, 0Ω, 0.063W, 0402", Case Code (Imperial)=0402, Case Code (Metric)=1005, Max Operating Temperature=155°C, Max Power Dissipation=63mW, Min Operating Temperature=-55°C, Package Quantity=1, Resistance=0mR, Temperature Coefficient=100ppm/°C, Tolerance=5%, Voltage Rating=50V, Case/Package=0402, Composition="Thick Film", Contact Plating=Tin, Depth=0.5mm, Features="Automotive AEC-Q200", Height=0.35mm, Lead Free="Lead Free", Length=1mm, Military Standard=Not, Mount="Surface Mount", Number of Terminations=2, Packaging="Tape and Reel", Power Rating=63mW, Radiation Hardening=No, Termination=SMD/SMT, Voltage Rating (DC)=50V, Weight=2.3E-05oz, Width=0.5mm
SERVO_1 SERVO_2 SERVO_3 SERVO_4 SERVO_5 SERVO_6 SERVO_7 SERVO_8 SERVO_9 SERVO_10 SERVO_11 SERVO_12 SERVO_13 SERVO_14 SERVO_15 SERVO_16: library part CMP-1502-01062-1, "THT Vertical Pin Header WR-PHD, Pitch 2.54 mm, Single Row, 3 pins", Contact Resistance=20mOhm, Manufacturer="Wurth Elektronik", Operating Temperature=-40to105degC, Rated Current=3A, Withstanding Voltage=500VAC, Working Voltage=250VAC, Datasheet URL=https://katalog.we-online.de/em/datasheet/6130xx11121.pdf, Gender=Male, Manufacturer URL=http://www.we-online.de, Mounting Technology=THT, Orientation=Vertical, Package Reference=61300311121, Packaging=Bag, Part Number=61300311121, Pin Number=3, Pitch=2.54mm, Publisher=WurthElektronik, Row Number=Single

## Via types
v1: diameter 0.5, hole 0.2, Top Layer to Bottom Layer, 17 vias
v2: diameter 2.1, hole 1.4, Top Layer to Bottom Layer, 1 vias

## Nets (pads, with @x,y where several pads share a name; then routed paths per layer and width w, separated by ;. In a path a pad name is that pad's centre, name@x,y a point inside that pad or via, vN(x,y) a via of type N, cw(c..) or ccw(c..) an arc to the next point about the centre after c; other vN are vias at no path point)
+12: C4.1 C6.2 C7.1 C9.2 C10.1 D1.1 D2.1 D3.1 D4.1 D9.1 D10.1 D11.1 D12.1 FUSE1.2 MOTOR_A1.5 MOTOR_B1.5 MOTOR_VIN_JMP.2 R5.2 | length 211
  Top Layer w0.254: R5.2 20.45,54.991 20.577,54.864
  Top Layer w0.5: MOTOR_B1.5@39.47,37.433 38.97,37.433 MOTOR_B1.5 40.948,37.383 ; 41.002,37.329 40.948,37.383 ; 41.434,37.433 41.384,37.383 40.948,37.383 ; C10.1 42.291,37.433 ; 45.339,39.116 45.72,38.735 49.403,38.735 ; 46.863,40.64 46.99,40.767 ; D1.1 49.403,38.735 ; D3.1 58.674,37.846 58.801,37.719 ; D4.1 62.357,38.227 61.849,37.719 ; D2.1 68.834,37.846 68.707,37.719 61.849,37.719 ; 49.403,38.735 49.403,37.719 58.801,37.719 ; 58.801,37.719 61.849,37.719
  Top Layer w0.8: 20.577,54.864 46.863,54.864 46.863,40.64 45.339,39.116 44.259,38.036 ; 41.434,37.433 42.291,37.433 43.656,37.433 44.259,38.036 ; C9.2 44.259,34.392 44.259,38.036
  Top Layer w1: MOTOR_VIN_JMP.2 12.827,45.974 FUSE1.2 13.226,49.273 13.227,49.274 14.988,49.274 ; 15.24,49.274 C4.1 ; v2(16.256,47.498) 16.256,47.796 14.988,49.064 14.988,49.274 ; 20.577,54.864 20.577,52.327 17.524,49.274 14.988,49.274
  Bottom Layer w0.5: 54.864,44.394 MOTOR_A1.5
  Bottom Layer w0.8: D10.1 28.55,40.414 ; D12.1 30.05,40.414 28.55,40.414 ; D11.1 41.275,40.337 ; D9.1 42.623,40.337 41.275,40.337 ; C7.1@54.864,43.482 54.864,44.394 51.379,44.394 48.514,47.259 48.514,49.657 47.752,50.419 19.177,50.419 16.129,47.371 16.129,37.084 16.154,37.109 28.55,37.109 ; 28.55,37.109 28.702,36.957 41.148,36.957 41.275,37.084 41.275,40.337 ; 28.55,37.109 28.55,40.414
+SERVO: C5.1 FUSE2.2 SERVO_1.2 SERVO_2.2 SERVO_3.2 SERVO_4.2 SERVO_5.2 SERVO_6.2 SERVO_7.2 SERVO_8.2 SERVO_9.2 SERVO_10.2 SERVO_11.2 SERVO_12.2 SERVO_13.2 SERVO_14.2 SERVO_15.2 SERVO_16.2 | length 64.7
  Top Layer w0.7: FUSE2.2 3.556,5.842 4.191,5.207 4.572,5.207 ; C5.1 4.572,4.155 4.572,5.207 ; SERVO_16.2 SERVO_12.2 SERVO_8.2 SERVO_4.2 SERVO_15.2 SERVO_11.2 SERVO_7.2 SERVO_3.2 SERVO_14.2 SERVO_10.2 SERVO_6.2 SERVO_2.2 SERVO_13.2 SERVO_9.2 SERVO_5.2 SERVO_1.2 7.62,5.207 4.572,5.207
GND: 1.1 3.3V.1 +1.1 +MOTOR_OK1.1 BAT_IN.2 C1.2 C2.2 C3.2 C4.2 C5.2 C6.1 C7.2 C8.2 C9.1 C10.2 C11.2 C12.2 C13.2 C14.2 C15.2 D5.2 D6.2 D7.2 D8.2 D13.2 D14.2 D15.2 D16.2 I2C_IN.1 I2C_OUTPUT1.1 I2C_OUTPUT2.1 I2C_OUTPUT3.1 I2C_OUTPUT4.1 MOTOR_A1.4 MOTOR_A1.6 MOTOR_A1.11 MOTOR_B1.4 MOTOR_B1.6 MOTOR_B1.11 MPU1.1 MPU1.9 MPU1.11 MPU1.12 MPU1.18 MPU1.25 PWM.1 PWM.2 PWM.11 PWM.21 PWM.22 PWM.26 PWM.27 PWM.28 R3.1 R7.1 R8.1 R10.1 R11.1 SERVO_1.1 SERVO_2.1 SERVO_3.1 SERVO_4.1 SERVO_5.1 SERVO_6.1 SERVO_7.1 SERVO_8.1 SERVO_9.1 SERVO_10.1 SERVO_11.1 SERVO_12.1 SERVO_13.1 SERVO_14.1 SERVO_15.1 SERVO_16.1 SERVO_IN.2 VIN.1
  other v1: 32.909,26.178 33.909,26.178 34.909,26.178 32.909,27.178 33.909,27.178 34.909,27.178 32.909,28.178 33.909,28.178 34.909,28.178
Net+1_2: +1.2 R4.1 | length 1.6
  Top Layer w0.254: +1.2 R4.1@4.318,31.75
Net+MOTOR_OK1_2: +MOTOR_OK1.2 R5.1 | length 1.6
  Top Layer w0.254: +MOTOR_OK1.2 R5.1
NetBAT_IN_1: BAT_IN.1 FUSE1.1 | length 5
  Top Layer w0.254: FUSE1.1@12.824,52.07 FUSE1.1
  Top Layer w1: BAT_IN.1 FUSE1.1@12.824,52.07
NetC8_1: C8.1 MOTOR_A1.12 | length 3.1
  Bottom Layer w0.254: MOTOR_A1.12 65.622,44.394 C8.1
NetC11_1: C11.1 MOTOR_B1.12 | length 2.9
  Top Layer w0.254: C11.1 30.443,37.719 30.779,37.383 MOTOR_B1.12
NetC12_1: C12.1 MPU1.20 | length 2.1
  Top Layer w0.254: MPU1.20 37.453,26.428 C12.1
NetC13_1: C13.1 MPU1.10 | length 2
  Top Layer w0.254: C13.1 30.611,26.928 MPU1.10
NetD1_2: D1.2 D5.1 M_OUTA1.1 MOTOR_A1.7 | length 20.5
  Top Layer w0.5: D1.2 49.452,44.069 50.952,44.069 ; M_OUTA1.1 50.952,50.491 50.952,44.069 ; D5.1 50.952,44.069
  Bottom Layer w0.5: M_OUTA1.1 51.896,47.545 53.747,45.694 MOTOR_A1.7
NetD2_2: D2.2 D6.1 M_OUTB1.1 MOTOR_A1.10 | length 20.9
  Top Layer w0.5: M_OUTB1.1@68.642,51.801 M_OUTB1.1 70.383,50.06 70.383,43.991 ; D2.2@68.834,43.991 70.383,43.991 ; D6.1 71.931,43.991 70.383,43.991
  Bottom Layer w0.5: MOTOR_A1.10 64.236,45.694 68.47,49.928 68.47,50.897 M_OUTB1.1
NetD3_2: D3.2 D7.1 M_OUTA1.2 MOTOR_A1.8 | length 15.6
  Top Layer w0.5: D7.1 57.15,44.069 ; M_OUTA1.2 57.15,51.181 57.15,44.069 ; D3.2 57.15,44.069
  Bottom Layer w0.254: M_OUTA1.2@56.867,51.406 M_OUTA1.2
  Bottom Layer w0.5: MOTOR_A1.8 M_OUTA1.2@56.867,51.406
NetD4_2: D4.2 D8.1 M_OUTB1.2 MOTOR_A1.9 | length 16.7
  Top Layer w0.5: D4.2 63.969,43.737 ; M_OUTB1.2 63.969,51.396 63.969,43.737 ; D8.1@65.659,43.66 65.581,43.737 63.969,43.737
  Bottom Layer w0.5: MOTOR_A1.9 62.767,50.194 M_OUTB1.2
NetD9_2: D9.2 D13.1 M_OUTC1.1 MOTOR_B1.7 | length 20.6
  Top Layer w0.5: MOTOR_B1.7 40.588,38.683 43.267,41.362 M_OUTC1.1
  Bottom Layer w0.5: D9.2 44.171,43.688 ; M_OUTC1.1 44.171,47.483 44.171,43.688 ; D13.1 45.671,43.688 44.171,43.688
NetD10_2: D10.2 D14.1 M_OUTD1.1 MOTOR_B1.10 | length 21.5
  Top Layer w0.5: M_OUTD1.1@27.004,48.387 27.004,42.973 31.294,38.683 MOTOR_B1.10
  Bottom Layer w0.5: D14.1@23.876,43.815 25.654,43.815 ; D10.2 25.654,43.815 ; M_OUTD1.1 25.654,46.99 25.654,43.815
NetD11_2: D11.2 D15.1 M_OUTC1.2 MOTOR_B1.8 | length 17.2
  Top Layer w0.5: M_OUTC1.2 38.92,47.734 MOTOR_B1.8
  Bottom Layer w0.5: D15.1 37.948,43.688 ; M_OUTC1.2 37.948,48.068 37.948,43.688 ; D11.2 39.448,43.688 37.948,43.688
NetD12_2: D12.2 D16.1 M_OUTD1.2 MOTOR_B1.9 | length 17.5
  Top Layer w0.5: M_OUTD1.2@32.004,48.387 33.02,47.371 MOTOR_B1.9
  Bottom Layer w0.5: D12.2 30.226,43.737 31.75,43.737 ; M_OUTD1.2 31.75,48.086 31.75,43.737 ; D16.1@33.274,43.737 31.75,43.737
NetFUSE2_1: FUSE2.1 SERVO_IN.1 | length 5.2
  Top Layer w0.7: FUSE2.1 5.715,20.196 SERVO_IN.1
NetI2C_IN_3: I2C_IN.3 I2C_OUTPUT1.3 I2C_OUTPUT2.3 I2C_OUTPUT3.3 I2C_OUTPUT4.3 MPU1.23 PWM.23 R2.1 | length 75.7
  Top Layer w0.254: MPU1.23 37.096,27.928 v1(37.719,27.305) ; PWM.23 52.399,22.3 v1(52.832,22.733) ; 67.437,0.889 67.437,4.953 67.437,9.144 67.437,13.081 67.437,17.145 67.564,17.272 67.564,20.955 ; v1(67.564,22.733) 67.564,20.955 ; R2.1@68.368,20.913 R2.1 67.564,20.955
  Bottom Layer w0.254: v1(37.719,27.305) 38.735,27.305 39.116,26.924 66.421,26.924 67.564,25.781 v1(67.564,22.733) v1(52.832,22.733)
NetI2C_IN_4: I2C_IN.4 I2C_OUTPUT1.4 I2C_OUTPUT2.4 I2C_OUTPUT3.4 I2C_OUTPUT4.4 MPU1.24 PWM.24 R1.1 | length 74.8
  Top Layer w0.254: MPU1.24 64.495,28.428 64.515,28.448 64.664,28.299 64.664,24.511 ; PWM.24 51.749,24.362 51.898,24.511 64.664,24.511 ; 64.897,0.889 64.897,4.953 64.897,9.144 64.897,13.081 64.897,17.145 64.664,17.378 64.664,24.511 ; R1.1 64.664,24.511
NetMOTOR_A1_1: MOTOR_A1.1 PWM.7 SERVO_2.3 | length 34.7
  Top Layer w0.254: SERVO_2.3 21.082,8.001 21.082,14.964 21.231,15.113 47.721,15.113 47.882,15.274 47.882,15.453 47.9,15.471 PWM.7
NetMOTOR_A1_2: MOTOR_A1.2 PWM.8 SERVO_6.3 | length 31.6
  Top Layer w0.254: SERVO_6.3 24.13,8.001 24.13,13.97 24.384,14.224 48.768,14.224 48.833,14.289 49.131,14.289 49.149,14.307 PWM.8
NetMOTOR_A1_3: MOTOR_A1.3 PWM.9 SERVO_10.3 | length 28.8
  Top Layer w0.254: SERVO_10.3 27.559,13.313 27.708,13.462 49.65,13.462 49.799,13.611 PWM.9
NetMOTOR_A1_13: MOTOR_A1.13 R8.2 | length 5.2
  Bottom Layer w0.254: MOTOR_A1.13 67.042,43.744 R8.2
NetMOTOR_A1_14: MOTOR_A1.14 MOTOR_SWITCH.1B R7.2 | length 66.5
  Top Layer w0.254: v1(15.367,34.798) 17.78,37.211 17.78,44.323 R7.2
  Bottom Layer w0.254: v1(15.367,34.798) 59.944,34.798 60.96,35.814 60.96,42.926 61.214,43.18 62.681,43.18 MOTOR_A1.14
NetMOTOR_A1_15: MOTOR_A1.15 R6.1 | length 2.4
  Bottom Layer w0.254: MOTOR_A1.15 62.793,42.418 R6.1
NetMOTOR_A1_16: MOTOR_A1.16 PWM.10 SERVO_14.3 | length 25.4
  Top Layer w0.254: SERVO_14.3 30.988,8.001 30.988,11.811 31.877,12.7 49.867,12.7 50.326,13.159 50.326,14.482 PWM.10
NetMOTOR_B1_1: MOTOR_B1.1 PWM.4 SERVO_5.3 | length 95.8
  Top Layer w0.254: SERVO_5.3 11.049,16.637 12.065,17.653 47.715,17.653 47.882,17.487 47.882,17.438 47.9,17.421 PWM.4 ; v1(38.862,33.274) 38.92,33.332 MOTOR_B1.1
  Bottom Layer w0.254: SERVO_5.3 8.763,10.16 8.763,18.415 22.225,31.877 37.465,31.877 v1(38.862,33.274)
NetMOTOR_B1_2: MOTOR_B1.2 PWM.5 SERVO_9.3 | length 94.3
  Top Layer w0.254: SERVO_9.3 14.478,8.001 14.478,16.869 14.627,17.018 47.7,17.018 47.882,16.837 47.882,16.788 47.9,16.771 PWM.5 ; MOTOR_B1.2 39.878,35.433 40.259,35.052 40.259,34.133 40.005,33.879 v1(40.005,32.893)
  Bottom Layer w0.254: SERVO_9.3 10.414,11.811 10.414,17.907 23.495,30.988 38.1,30.988 v1(40.005,32.893)
NetMOTOR_B1_3: MOTOR_B1.3 PWM.6 SERVO_13.3 | length 90.9
  Top Layer w0.254: SERVO_13.3 17.653,15.494 18.28,16.121 PWM.6 ; MOTOR_B1.3 40.244,36.083 41.275,35.052 v1(41.275,32.893)
  Bottom Layer w0.254: SERVO_13.3 12.7,12.827 12.7,18.415 24.003,29.718 38.608,29.718 41.275,32.385 v1(41.275,32.893)
NetMOTOR_B1_13: MOTOR_B1.13 R11.2 | length 2.9
  Top Layer w0.254: R11.2 30.658,36.733 MOTOR_B1.13
NetMOTOR_B1_14: MOTOR_B1.14 MOTOR_SWITCH.2B R10.2 | length 21.7
  Top Layer w0.254: R10.2 20.32,44.196 20.32,37.338 22.225,35.433 30.861,35.433 31.496,36.068 33.005,36.068 MOTOR_B1.14
NetMOTOR_B1_15: MOTOR_B1.15 R9.1 | length 2.8
  Top Layer w0.254: R9.1 30.755,34.438 31.75,35.433 MOTOR_B1.15
NetMOTOR_B1_16: MOTOR_B1.16 PWM.3 SERVO_1.3 | length 95.9
  Top Layer w0.254: SERVO_1.3 7.874,8.001 7.874,17.018 9.271,18.415 47.596,18.415 47.714,18.297 47.721,18.297 47.882,18.137 47.882,18.088 47.9,18.071 PWM.3 ; v1(32.893,32.893) 32.893,32.96 33.02,33.087 MOTOR_B1.16
  Bottom Layer w0.254: SERVO_1.3 6.096,9.525 6.096,17.653 21.336,32.893 v1(32.893,32.893)
NetMOTOR_SWITCH_1A: MOTOR_SWITCH.1A R13.1 | length 2.8
  Top Layer w0.254: R13.1 17.78,33.02 MOTOR_SWITCH.1A
NetMOTOR_SWITCH_2A: MOTOR_SWITCH.2A R12.1 | length 2.6
  Top Layer w0.254: MOTOR_SWITCH.2A 20.32,32.787 R12.1
NetMPU1_6: MPU1.6
NetMPU1_7: MPU1.7
NetPWM_12: PWM.12 SERVO_3.3 | length 23.8
  Top Layer w0.254: SERVO_3.3 34.163,12.065 50.927,12.065 51.749,12.887 PWM.12
NetPWM_13: PWM.13 SERVO_7.3 | length 21.3
  Top Layer w0.254: SERVO_7.3 37.338,8.001 37.338,11.43 51.435,11.43 52.399,12.394 PWM.13
NetPWM_14: PWM.14 SERVO_11.3 | length 18.4
  Top Layer w0.254: SERVO_11.3 40.767,10.922 51.943,10.922 53.049,12.028 PWM.14
NetPWM_15: PWM.15 SERVO_15.3 | length 16.3
  Top Layer w0.254: SERVO_15.3 44.069,9.779 44.704,10.414 52.451,10.414 53.915,11.878 PWM.15 PWM.15@53.975,15.41
NetPWM_16: PWM.16 SERVO_4.3 | length 15.9
  Top Layer w0.254: SERVO_4.3 47.244,8.001 47.244,9.779 52.959,9.779 54.991,11.811 54.991,16.129 54.983,16.121 PWM.16
NetPWM_17: PWM.17 SERVO_8.3 | length 14
  Top Layer w0.254: SERVO_8.3 50.673,8.255 51.689,9.271 53.594,9.271 55.88,11.557 55.88,16.615 55.731,16.764 53.921,16.764 PWM.17
NetPWM_18: PWM.18 SERVO_12.3 | length 13.1
  Top Layer w0.254: PWM.18 53.936,17.399 56.007,17.399 56.769,16.637 56.769,10.668 SERVO_12.3
NetPWM_19: PWM.19 SERVO_16.3 | length 13.5
  Top Layer w0.254: PWM.19 53.951,18.034 56.388,18.034 57.912,16.51 57.912,8.696 57.277,8.061 SERVO_16.3
NetPWM_20: PWM.20 R3.2 | length 2.7
  Top Layer w0.254: PWM.20 55.932,18.721 R3.2
VCC: 1.2 1.4 3.3V.2 C1.1 C3.1 C14.1 C15.1 I2C_IN.2 I2C_OUTPUT1.2 I2C_OUTPUT2.2 I2C_OUTPUT3.2 I2C_OUTPUT4.2 MPU1.8 MPU1.13 PWM.25 R1.2 R2.2 R4.2 R6.2 R9.2 R12.2 R13.2 | length 188.7
  Top Layer w0.254: R4.2 10.541,31.75 10.922,32.131 ; 24.384,29.909 24.384,33.274 24.638,33.528 R9.2@30.501,33.528 ; 27.432,29.909 27.432,24.765 28.956,23.241 C15.1 ; 29.781,29.909 29.864,29.826 C14.1 C14.1@29.864,27.751 ; C14.1@29.96,27.928 MPU1.8 ; C15.1@32.385,23.368 32.385,24.904 MPU1.13 ; C1.1@50.8,22.225 51.099,21.926 PWM.25
  Top Layer w0.5: 3.3V.2 6.985,32.639 10.795,32.639 ; 10.795,32.131 10.795,32.639 ; 1.4 10.795,32.639 ; C3.1 10.922,32.131 10.922,31.051 12.065,29.909 ; R13.2 16.637,29.909 ; 21.209,30.035 R12.2 ; 29.781,29.909 27.432,29.909 24.384,29.909 ; C1.1@50.8,22.225 50.419,21.844 20.13,21.844 12.065,29.909 ; R1.2 68.453,24.511 69.13,23.834 ; 69.977,0.889 69.977,4.953 69.977,9.144 69.977,13.081 69.977,17.145 69.977,20.108 R2.2 69.13,23.834 ; 12.065,29.909 16.637,29.909 ; 16.637,29.909 24.384,29.909 ; 24.384,29.909 25.336,30.861 68.834,30.861 69.215,30.48 69.215,23.918 69.13,23.834
VIN: 1.3 C2.1 MOTOR_VIN_JMP.1 VIN.2 | length 10.4
  Top Layer w0.254: MOTOR_VIN_JMP.1@8.495,44.182 MOTOR_VIN_JMP.1
  Top Layer w0.5: VIN.2 1.814,41.239 C2.1 ; C2.1@5.588,40.913 8.451,40.913 1.3 MOTOR_VIN_JMP.1@8.495,44.182
pads on no net: MPU1.2 MPU1.3 MPU1.4 MPU1.5 MPU1.14 MPU1.15 MPU1.16 MPU1.17 MPU1.19 MPU1.21 MPU1.22 PWM.29